# Altium PCB Linux_board.va_2.PcbDoc (part 2 of 2)
Units mil, origin at the board's own origin, x right, y up, seen from the top; angles counter-clockwise.
Board outline 3960 x 3160 mil, 2 copper layers (Top Layer, Bottom Layer); 142 components, 153 nets, 700 pads, 148 vias.
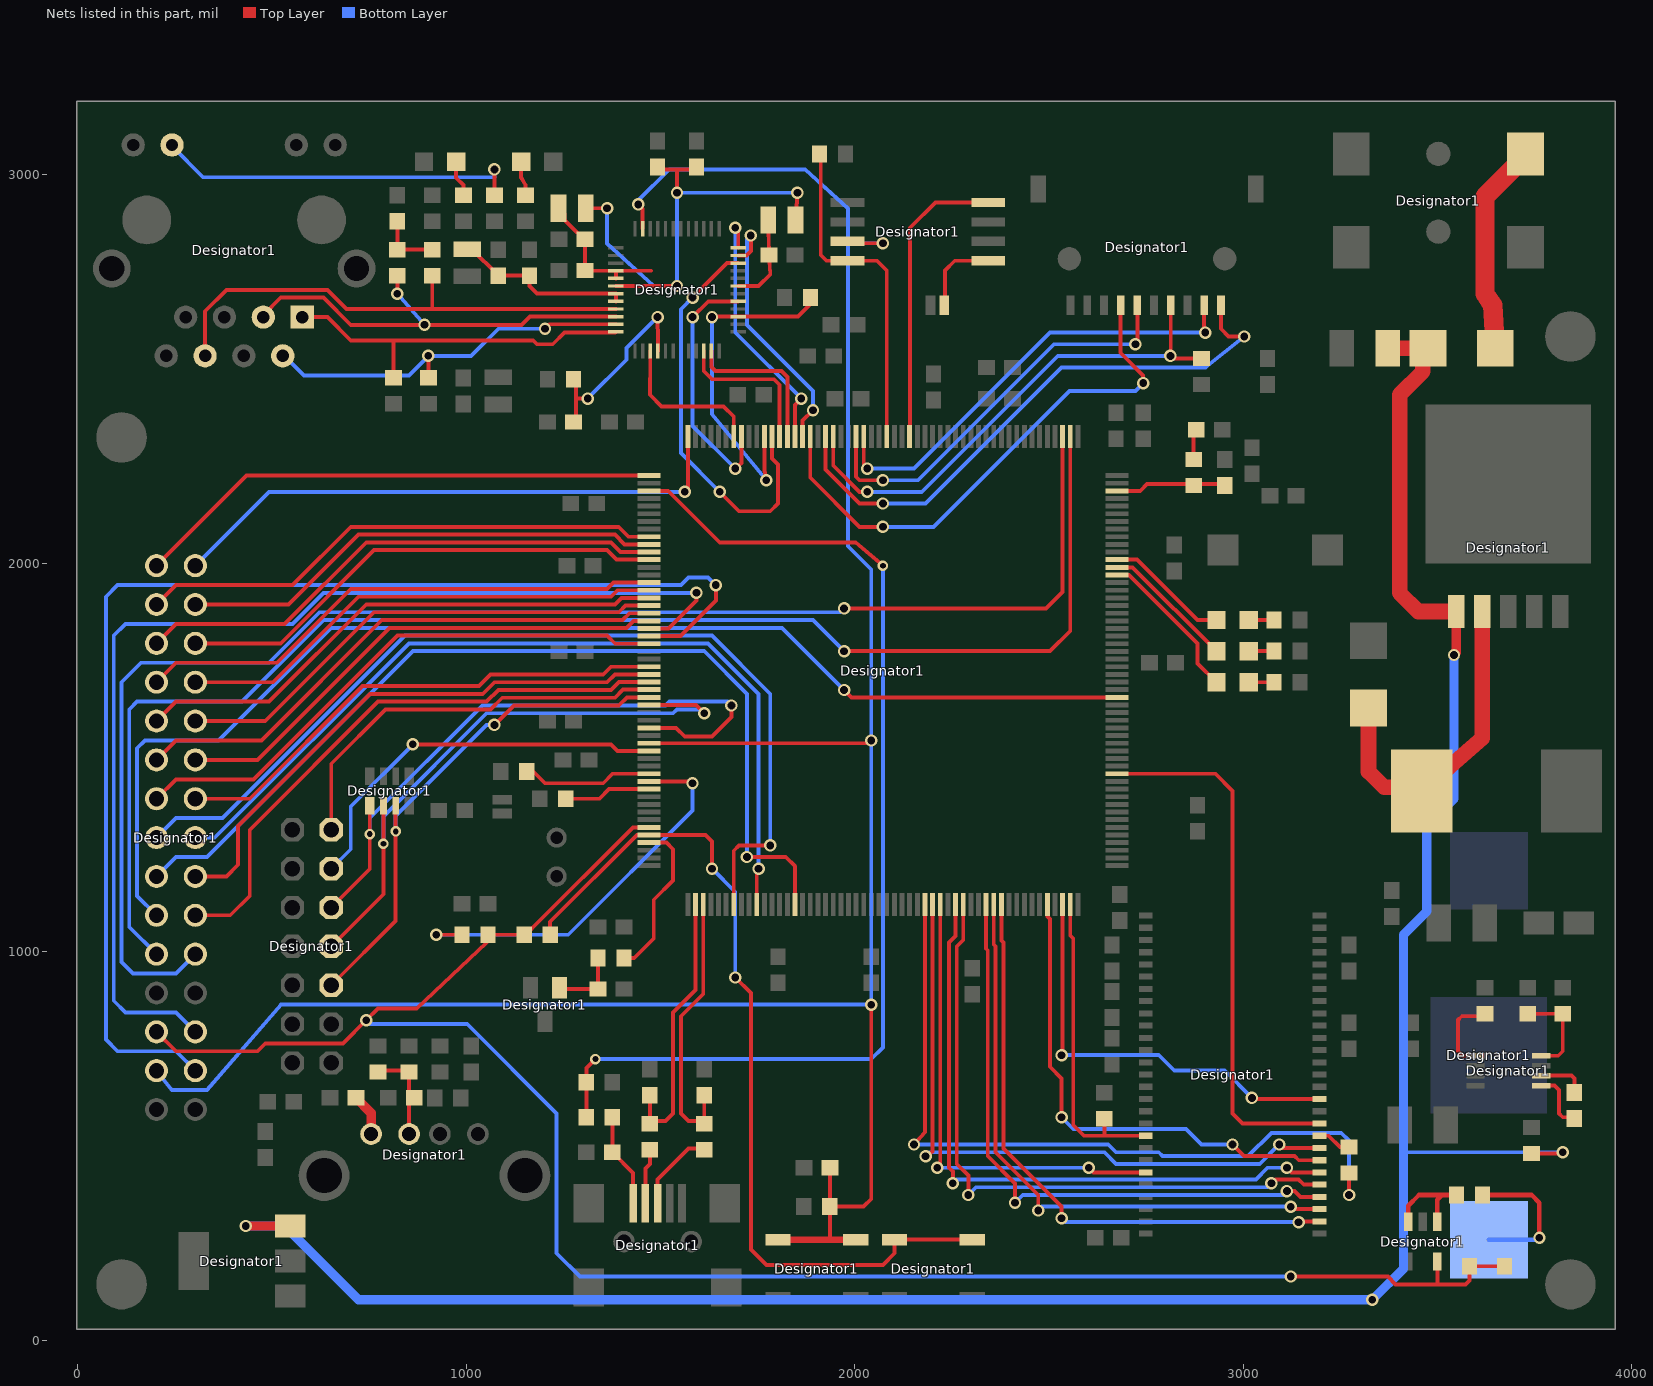
[diagram p2: the nets of this part, all layers, seen from the top]

## Via types
v1: diameter 32, hole 20, Top Layer to Bottom Layer, 84 vias
v2: diameter 31.68, hole 19.68, Top Layer to Bottom Layer, 53 vias
v3: diameter 27, hole 15, Top Layer to Bottom Layer, 7 vias
v4: diameter 35.62, hole 23.62, Top Layer to Bottom Layer, 4 vias

## Nets (pads, with @x,y where several pads share a name; then routed paths per layer and width w, separated by ;. In a path a pad name is that pad's centre, name@x,y a point inside that pad or via, vN(x,y) a via of type N, cw(c..) or ccw(c..) an arc to the next point about the centre after c; other vN are vias at no path point) (continued)
N$42: Designator1.1@1276.49,2474.27 Designator1.2@1276.49,2364.27 Designator1.P$16 | length 522.5
  Top Layer w10: Designator1.2@1276.49,2364.27 1283.02,2364.27 1283.02,2424.27 ; Designator1.1@1276.49,2474.27 1283.02,2470.8 1283.02,2424.27 ; v1(1313.02,2424.27) 1283.02,2424.27 ; v1(1493.02,2634.27) 1493.81,2573.48 Designator1.P$16@1493.81,2546.79
  Bottom Layer w10: v1(1313.02,2424.27) 1413.02,2524.27 1413.02,2554.27 v1(1493.02,2634.27)
N$43: Designator1.18@203.02,1394.27 Designator1.23@1470.66,1793.17 | length 1450.3
  Top Layer w10: Designator1.18@203.02,1394.27 253.02,1444.27 453.02,1444.27 823.02,1814.27 1363.02,1814.27 1384.13,1793.17 Designator1.23@1470.66,1793.17
N$44: Designator1.17@303.02,1394.27 Designator1.26@1470.66,1734.11 | length 1308.4
  Top Layer w10: Designator1.17@303.02,1394.27 443.02,1394.27 733.02,1684.27 1033.02,1684.27 1063.02,1714.27 1353.02,1714.27 1372.87,1734.11 Designator1.26@1470.66,1734.11
N$45: Designator1.8@2344.13,2929.27 Designator1.179 | length 766.1
  Top Layer w10: Designator1.179@2141.92,2326.63 2143.02,2327.73 2143.02,2864.27 2208.02,2929.27 Designator1.8@2344.13,2929.27
N$46: Designator1.9@1470.66,2068.76 Designator1.28@203.02,1894.27 | length 1361
  Top Layer w10: Designator1.28@203.02,1894.27 253.02,1944.27 553.02,1944.27 703.02,2094.27 1393.02,2094.27 1418.54,2068.76 Designator1.9@1470.66,2068.76
N$47: Designator1.11@653.02,1214.27 Designator1.37@1470.66,1517.57 | length 1021.5
  Top Layer w10: v2(863.02,1534.27) 1373.02,1534.27 1389.72,1517.57 Designator1.37@1470.66,1517.57
  Bottom Layer w10: Designator1.11@653.02,1214.27 703.02,1264.27 703.02,1374.27 v2(863.02,1534.27)
N$48: Designator1.3@818.77,1375.88 Designator1.5@653.02,914.27 Designator1.30@1470.66,1655.37 | length 1348.6
  Top Layer w10: Designator1.5@653.02,914.27 818.77,1080.02 v3(818.77,1310.02) Designator1.3@818.77,1375.88 ; v1(1073.02,1584.27) 1123.02,1634.27 1393.02,1634.27 1414.13,1655.37 Designator1.30@1470.66,1655.37
  Bottom Layer w10: v3(818.77,1310.02) 818.77,1350.02 1053.02,1584.27 v1(1073.02,1584.27)
N$49: Designator1.2@787.28,1375.88 Designator1.7@653.02,1014.27 Designator1.31@1470.66,1635.69 | length 1582.6
  Top Layer w10: Designator1.7@653.02,1014.27 787.28,1148.52 v3(787.28,1278.52) Designator1.2@787.28,1375.88 ; Designator1.31@1470.66,1635.69 1591.61,1635.69 v1(1613.02,1614.27)
  Bottom Layer w10: v3(787.28,1278.52) 787.28,1348.52 1053.02,1614.27 1533.02,1614.27 1543.02,1624.27 1603.02,1624.27 v1(1613.02,1614.27)
N$50: Designator1.1@752.04,1375.88 Designator1.9@653.02,1114.27 Designator1.34@1470.66,1576.63 | length 1675.3
  Top Layer w10: Designator1.9@653.02,1114.27 752.04,1213.28 v3(752.04,1303.28) Designator1.1@752.04,1375.88 ; Designator1.34@1470.66,1576.63 1540.66,1576.63 1563.02,1554.27 1633.02,1554.27 1683.02,1604.27 v1(1683.02,1634.27)
  Bottom Layer w10: v3(752.04,1303.28) 752.04,1344.27 1042.04,1634.27 1513.02,1634.27 1523.02,1644.27 1673.02,1644.27 v1(1683.02,1634.27)
N$52: Designator1.13@303.02,1194.27 Designator1.27@1470.66,1714.43 | length 1441.7
  Top Layer w10: Designator1.13@303.02,1194.27 383.02,1194.27 413.02,1224.27 413.02,1324.27 753.02,1664.27 1043.02,1664.27 1073.02,1694.27 1363.02,1694.27 1383.18,1714.43 Designator1.27@1470.66,1714.43
N$53: Designator1.29@3196.65,306.31 Designator1.94 | length 1540.4
  Top Layer w10: Designator1.94@2378.14,1121.91 2378.14,1029.15 2383.02,1024.27 2383.02,494.27 2533.02,344.27 v1(2533.02,314.27) ; v1(3143.02,304.27) 3145.07,306.31 Designator1.29@3196.65,306.31
  Bottom Layer w10: v1(2533.02,314.27) 2543.02,304.27 v1(3143.02,304.27)
N$54: Designator1.30@3196.65,337.81 Designator1.93 | length 1565.5
  Top Layer w10: Designator1.93@2358.46,1121.91 2358.46,1018.83 2363.02,1014.27 2363.02,484.27 2473.02,374.27 v1(2473.02,334.27) ; v1(3123.02,344.27) 3129.48,337.81 Designator1.30@3196.65,337.81
  Bottom Layer w10: v1(2473.02,334.27) 2483.02,344.27 v1(3123.02,344.27)
N$55: Designator1.31@3196.65,369.31 Designator1.92 | length 1600.7
  Top Layer w10: Designator1.92@2338.77,1121.91 2338.77,1008.52 2343.02,1004.27 2343.02,474.27 2413.02,404.27 v1(2413.02,354.27) ; v1(3113.02,384.27) 3133.02,384.27 3147.98,369.31 Designator1.31@3196.65,369.31
  Bottom Layer w10: v1(2413.02,354.27) 2433.02,374.27 3103.02,374.27 v1(3113.02,384.27)
N$56: Designator1.32@3196.65,400.8 Designator1.89 | length 1692.8
  Top Layer w10: Designator1.89@2279.72,1121.91 2279.72,1030.96 2263.02,1014.27 2263.02,454.27 2293.02,424.27 v1(2293.02,374.27) ; v1(3073.02,404.27) 3083.02,414.27 3143.02,414.27 3156.49,400.8 Designator1.32@3196.65,400.8
  Bottom Layer w10: v1(2293.02,374.27) 2313.02,394.27 3063.02,394.27 v1(3073.02,404.27)
N$57: Designator1.33@3196.65,432.3 Designator1.88 | length 1694
  Top Layer w10: v1(2253.02,404.27) 2253.02,434.27 2243.02,444.27 2243.02,1024.27 2260.03,1041.28 Designator1.88@2260.03,1121.91 ; v1(3113.02,444.27) 3124.99,432.3 Designator1.33@3196.65,432.3
  Bottom Layer w10: v1(2253.02,404.27) 2263.02,414.27 3033.02,414.27 3063.02,444.27 v1(3113.02,444.27)
N$58: Designator1.34@3196.65,463.8 Designator1.100 | length 1272.3
  Top Layer w10: Designator1.100@2496.25,1121.91 2496.25,1091.04 2503.02,1084.27 2503.02,704.27 2533.02,674.27 v1(2533.02,574.27) ; v1(2973.02,504.27) 3003.02,474.27 3133.02,474.27 3143.5,463.8 Designator1.34@3196.65,463.8
  Bottom Layer w10: v1(2533.02,574.27) 2563.02,544.27 2853.02,544.27 2893.02,504.27 v1(2973.02,504.27)
N$59: Designator1.22@2749.4,432.3 Designator1.86 | length 1222.1
  Top Layer w10: v1(2213.02,444.27) 2220.66,451.91 Designator1.86@2220.66,1121.91 ; v1(2603.02,444.27) 2614.99,432.3 Designator1.22@2749.4,432.3
  Bottom Layer w10: v1(2213.02,444.27) v1(2603.02,444.27)
N$60: Designator1.35@3196.65,495.29 Designator1.85 | length 1711.8
  Top Layer w10: v1(2183.02,474.27) 2200.98,486.31 Designator1.85@2200.98,1121.91 ; v1(3093.02,504.27) 3102,495.29 Designator1.35@3196.65,495.29
  Bottom Layer w10: v1(2183.02,474.27) 2193.02,484.27 2643.02,484.27 2673.02,454.27 3043.02,454.27 v1(3093.02,504.27)
N$61: Designator1.2@3273.02,430.8 Designator1.84 | length 1990.5
  Top Layer w10: v1(2153.02,504.27) 2181.29,536 Designator1.84@2181.29,1121.91 ; v1(3273.02,374.27) Designator1.2@3273.02,430.8
  Bottom Layer w10: v1(2153.02,504.27) 2653.02,504.27 2673.02,484.27 2783.02,484.27 2793.02,474.27 3013.02,474.27 3073.02,534.27 3253.02,534.27 3273.02,514.27 v1(3273.02,374.27)
N$62: Designator1.1@3273.02,497.73 Designator1.36@3196.65,526.79 | length 88.4
  Top Layer w10: Designator1.36@3196.65,526.79 3220.5,526.79 3249.56,497.73 Designator1.1@3273.02,497.73
N$63: Designator1.1@989.56,1044.27 Designator1.41@1470.66,1438.83 | length 1043.3
  Top Layer w10: v2(923.02,1044.27) Designator1.1@989.56,1044.27 ; Designator1.41@1470.66,1438.83 1578.46,1438.83 v2(1583.02,1434.27)
  Bottom Layer w10: v2(923.02,1044.27) 1263.02,1044.27 1583.02,1364.27 v2(1583.02,1434.27)
N$64: Designator1.1@1909.56,3054.27 Designator1.4@1981.92,2779.27 Designator1.182 | length 875.6
  Top Layer w10: Designator1.1@1909.56,3054.27 1913.02,3050.8 1913.02,2794.27 1928.02,2779.27 Designator1.4@1981.92,2779.27 2058.02,2779.27 2082.87,2754.43 Designator1.182@2082.87,2326.63
N$65: Designator1.11@303.02,1094.27 Designator1.28@1470.66,1694.74 | length 1515.9
  Top Layer w10: Designator1.11@303.02,1094.27 393.02,1094.27 443.02,1144.27 443.02,1314.27 773.02,1644.27 1053.02,1644.27 1083.02,1674.27 1373.02,1674.27 1393.5,1694.74 Designator1.28@1470.66,1694.74
N$66: Designator1.1@823.02,2880.8 Designator1.2@823.02,2807.73 Designator1.2@913.02,2807.73 | length 163.1
  Top Layer w10: Designator1.1@823.02,2880.8 Designator1.2@823.02,2807.73 Designator1.2@913.02,2807.73
N$67: Designator1.2@1003.02,2809.31 Designator1.2@1083.02,2740.8 Designator1.2@1163.02,2740.8 Designator1.P$7 Designator1.P$8 | length 466.1
  Top Layer w10: Designator1.2@1003.02,2809.31 1013.02,2810.8 Designator1.2@1083.02,2740.8 Designator1.2@1163.02,2740.8 1163.02,2714.27 1182.87,2694.43 Designator1.P$7@1385.54,2694.43 Designator1.P$8@1385.54,2674.74
N$68: Designator1.1@1240.43,907.58 Designator1.2@1339.56,904.27 Designator1.2@1339.56,984.27 | length 180.5
  Top Layer w10: Designator1.1@1240.43,907.58 1243.73,904.27 Designator1.2@1339.56,904.27 Designator1.2@1339.56,984.27
N$69: Designator1.202 Designator1.P$15 | length 403.4
  Top Layer w10: Designator1.P$15@1474.13,2546.79 1474.13,2523.17 1473.02,2434.27 1503.02,2404.27 1663.02,2404.27 1689.17,2378.13 Designator1.202@1689.17,2326.63
N$70: Designator1.2@1886.49,2684.27 Designator1.198 Designator1.P$27 | length 865.8
  Top Layer w10: v1(1633.02,2634.27) 1634.13,2635.37 Designator1.P$27@1700.5,2635.37 1854.13,2635.37 1883.02,2664.27 Designator1.2@1886.49,2684.27 ; Designator1.198@1767.91,2326.63 1767.91,2239.39 v1(1773.02,2214.27)
  Bottom Layer w10: v1(1633.02,2634.27) 1633.02,2384.27 v1(1773.02,2214.27)
N$71: Designator1.39@3196.65,621.28 Designator1.102 | length 1099.2
  Top Layer w10: v1(2533.02,734.27) 2535.62,736.87 Designator1.102@2535.62,1121.91 ; v1(3023.02,624.27) 3026.02,621.28 Designator1.39@3196.65,621.28
  Bottom Layer w10: v1(2533.02,734.27) 2783.02,734.27 2823.02,694.27 2953.02,694.27 v1(3023.02,624.27)
N$72: Designator1.195 Designator1.P$23 | length 400.7
  Top Layer w10: Designator1.P$23@1631.61,2546.79 1631.61,2505.69 1641.61,2495.69 1811.61,2495.69 1826.96,2480.33 Designator1.195@1826.96,2326.63
N$73: Designator1.196 Designator1.P$22 | length 394.8
  Top Layer w10: Designator1.P$22@1611.92,2546.79 1611.92,2495.37 1633.02,2474.27 1793.02,2474.27 1807.28,2460.02 Designator1.196@1807.28,2326.63
N$74: Designator1.201 Designator1.P$29 | length 659.2
  Top Layer w10: v1(1583.02,2634.27) 1623.5,2674.74 Designator1.P$29@1700.5,2674.74 ; v1(1693.02,2244.27) 1708.85,2258.44 Designator1.201@1708.85,2326.63
  Bottom Layer w10: v1(1583.02,2634.27) 1583.02,2354.27 v1(1693.02,2244.27)
N$75: Designator1.1@2230.74,2664.27 Designator1.5@2344.13,2779.27 | length 212.4
  Top Layer w10: Designator1.1@2230.74,2664.27 2233.02,2666.55 2233.02,2754.27 2258.02,2779.27 Designator1.5@2344.13,2779.27
N$76: Designator1.197 Designator1.P$34 | length 1065.9
  Top Layer w10: v1(1583.02,2684.27) 1671.92,2773.17 Designator1.P$34@1700.5,2773.17 ; v1(1653.02,2184.27) 1703.02,2134.27 1783.02,2134.27 1803.02,2154.27 1803.02,2254.27 1787.59,2269.7 Designator1.197@1787.59,2326.63
  Bottom Layer w10: v1(1583.02,2684.27) 1553.02,2654.27 1553.02,2284.27 v1(1653.02,2184.27)
N$77: Designator1.193 Designator1.P$35 | length 680.5
  Top Layer w10: Designator1.P$35@1700.5,2792.85 1721.61,2792.85 1733.02,2804.27 v1(1733.02,2844.27) ; Designator1.193@1866.33,2326.63 1866.33,2367.57 v1(1893.02,2394.27)
  Bottom Layer w10: v1(1733.02,2844.27) 1723.02,2834.27 1723.02,2614.27 1893.02,2444.27 v1(1893.02,2394.27)
N$78: Designator1.194 Designator1.P$36 | length 669.7
  Top Layer w10: v1(1693.02,2864.27) 1700.5,2856.79 Designator1.P$36@1700.5,2812.54 ; Designator1.194@1846.65,2326.63 1846.65,2407.89 v1(1863.02,2424.27)
  Bottom Layer w10: v1(1693.02,2864.27) 1693.02,2594.27 v1(1863.02,2424.27)
N$79: Designator1.2@1156.49,1464.27 Designator1.40@1470.66,1458.52 | length 336.6
  Top Layer w10: Designator1.2@1156.49,1464.27 1173.02,1464.27 1203.02,1434.27 1353.02,1434.27 1377.28,1458.52 Designator1.40@1470.66,1458.52
N$80: Designator1.143 Designator1.A@2931.69,1694.27 | length 400.7
  Top Layer w10: Designator1.143@2675.39,1970.33 2706.96,1970.33 2883.02,1794.27 2883.02,1742.93 Designator1.A@2931.69,1694.27
N$81: Designator1.2@993.02,2947.73 Designator1.C@974.36,3034.27 | length 94.3
  Top Layer w10: Designator1.C@974.36,3034.27 974.36,2992.93 993.02,2974.27 Designator1.2@993.02,2947.73
N$82: Designator1.10@1470.66,2049.07 Designator1.27@303.02,1894.27 | length 1252.6
  Top Layer w10: Designator1.27@303.02,1894.27 543.02,1894.27 723.02,2074.27 1383.02,2074.27 1408.22,2049.07 Designator1.10@1470.66,2049.07
N$83: Designator1.2@1256.49,1394.27 Designator1.42@1470.66,1419.15 | length 224.5
  Top Layer w10: Designator1.2@1256.49,1394.27 1343.02,1394.27 1367.91,1419.15 Designator1.42@1470.66,1419.15
N$84: Designator1.2@2643.02,570.8 Designator1.19@2749.4,526.79 Designator1.103 | length 812.6
  Top Layer w10: Designator1.103@2555.31,1121.91 2555.31,1041.98 2563.02,1034.27 2563.02,554.27 2590.5,526.79 2643.02,526.79 ; Designator1.2@2643.02,570.8 2643.02,526.79 ; Designator1.19@2749.4,526.79 2643.02,526.79
N$85: Designator1.37@3196.65,558.28 Designator1.117 | length 1380.4
  Top Layer w10: Designator1.117@2675.39,1458.52 2928.77,1458.52 2973.02,1414.27 2973.02,584.27 2999.01,558.28 Designator1.37@3196.65,558.28
N$86: Designator1.1@1237.98,2914.27 Designator1.1@1306.49,2754.27 Designator1.1@1306.49,2834.27 Designator1.P$4@1385.54,2753.48 Designator1.P$5@1385.54,2733.8 | length 470.1
  Top Layer w10: Designator1.1@1237.98,2914.27 1253.02,2899.23 1253.02,2884.27 1283.02,2854.27 Designator1.1@1306.49,2834.27 Designator1.1@1306.49,2754.27 1476.49,2753.48 Designator1.P$4@1385.54,2753.48 Designator1.P$5@1385.54,2733.8
N$87: Designator1.1@1777.98,2884.27 Designator1.2@1779.56,2794.27 Designator1.P$31 | length 235.1
  Top Layer w10: Designator1.P$31@1700.5,2714.11 1752.87,2714.11 1783.02,2744.27 Designator1.2@1779.56,2794.27 Designator1.1@1777.98,2884.27
N$88: Designator1.2@1153.02,2947.73 Designator1.C@1141.69,3034.27 | length 89.7
  Top Layer w10: Designator1.C@1141.69,3034.27 1141.69,2992.93 1153.02,2974.27 Designator1.2@1153.02,2947.73
N$89: Designator1.1@1493.02,3020.8 Designator1.1@1593.02,3020.8 Designator1.2@1308.06,2914.27 Designator1.2@1848.06,2884.27 Designator1.P$6@1385.54,2714.11 | length 1331.4
  Top Layer w10: Designator1.2@1308.06,2914.27 v1(1363.02,2914.27) ; Designator1.P$6@1385.54,2714.11 1523.02,2714.11 v1(1543.02,2714.27) ; Designator1.1@1493.02,3014.27 Designator1.1@1493.02,3020.8 1499.56,3014.27 1543.02,3014.27 ; v1(1543.02,2954.27) 1543.02,3014.27 ; Designator1.1@1593.02,3020.8 1593.02,3014.27 1543.02,3014.27 ; Designator1.2@1848.06,2884.27 1848.06,2879.23 v1(1853.02,2954.27)
  Bottom Layer w10: v1(1363.02,2914.27) 1363.02,2824.11 1483.02,2714.11 1492.87,2714.11 v1(1543.02,2714.27) v1(1543.02,2954.27) v1(1853.02,2954.27)
N$90: Designator1.144 Designator1.A@2931.69,1774.27 | length 345.7
  Top Layer w10: Designator1.144@2675.39,1990.02 2715.94,1990.02 Designator1.A@2931.69,1774.27
N$91: Designator1.1@3500.43,305.45 Designator1.2@3549.56,374.27 Designator1.3@3425.62,305.45 | length 250.7
  Top Layer w12: Designator1.3@3425.62,305.45 3425.62,346.87 3453.02,374.27 3513.02,374.27 ; Designator1.1@3500.43,305.45 3500.43,361.67 3513.02,374.27 ; Designator1.2@3549.56,374.27 3513.02,374.27
N$92: Designator1.2@1073.02,2947.73 Designator1.11@243.02,3077.27 | length 952.7
  Top Layer w10: Designator1.2@1073.02,2947.73 v1(1073.02,3014.27)
  Bottom Layer w10: Designator1.11@243.02,3077.27 243.02,3074.27 323.02,2994.27 1073.02,2994.27 v1(1073.02,3014.27)
N$94: Designator1.145 Designator1.A@2931.69,1854.27 | length 320.7
  Top Layer w10: Designator1.145@2675.39,2009.7 2727.59,2009.7 2883.02,1854.27 Designator1.A@2931.69,1854.27
N$95: Designator1.1@3079.56,1854.27 Designator1.C@3014.36,1854.27 | length 65.2
  Top Layer w10: Designator1.C@3014.36,1854.27 Designator1.1@3079.56,1854.27
N$96: Designator1.2@1473.02,557.73 Designator1.2@1473.02,630.8 Designator1.54@1590.74,1121.91 | length 705.6
  Top Layer w10: Designator1.2@1473.02,630.8 Designator1.2@1473.02,557.73 1479.56,564.27 1513.02,564.27 1533.02,584.27 1533.02,844.27 1590.74,901.98 Designator1.54@1590.74,1121.91
N$97: Designator1.2@1613.02,557.73 Designator1.2@1613.02,630.8 Designator1.55 | length 713.3
  Top Layer w10: Designator1.55@1610.43,1121.91 1610.43,891.67 1553.02,834.27 1553.02,584.27 1573.02,564.27 1609.56,564.27 Designator1.2@1613.02,557.73 ; Designator1.2@1613.02,630.8 Designator1.2@1613.02,557.73 ; Designator1.2@1619.56,557.73 Designator1.2@1613.02,557.73
N$98: Designator1.1@3079.56,1774.27 Designator1.C@3014.36,1774.27 | length 65.2
  Top Layer w10: Designator1.C@3014.36,1774.27 Designator1.1@3079.56,1774.27
N$99: Designator1.1@1473.02,490.8 Designator1.D-@1461.53,352.69 | length 142.9
  Top Layer w10: Designator1.D-@1461.53,352.69 1461.53,442.77 1473.02,454.27 Designator1.1@1473.02,490.8
N$100: Designator1.1@1613.02,490.8 Designator1.D+@1493.02,352.69 | length 216.1
  Top Layer w10: Designator1.D+@1493.02,352.69 1493.02,414.27 1573.02,494.27 1609.56,494.27 Designator1.1@1613.02,490.8
N$101: Designator1.1@3079.56,1694.27 Designator1.C@3014.36,1694.27 | length 65.2
  Top Layer w10: Designator1.C@3014.36,1694.27 Designator1.1@3079.56,1694.27
N$102: Designator1.1@1376.49,574.27 Designator1.2@1376.49,484.27 Designator1.VBUS@1430.03,352.69 | length 243.8
  Top Layer w10: Designator1.1@1376.49,574.27 Designator1.2@1376.49,484.27 1430.03,430.72 Designator1.VBUS@1430.03,352.69
N$103: Designator1.11@1470.66,2029.39 Designator1.26@203.02,1794.27 | length 1385.6
  Top Layer w10: Designator1.26@203.02,1794.27 253.02,1844.27 533.02,1844.27 743.02,2054.27 1373.02,2054.27 1397.91,2029.39 Designator1.11@1470.66,2029.39
N$104: Designator1.12@1470.66,2009.7 Designator1.25@303.02,1794.27 | length 1277.2
  Top Layer w10: Designator1.25@303.02,1794.27 523.02,1794.27 763.02,2034.27 1363.02,2034.27 1387.59,2009.7 Designator1.12@1470.66,2009.7
N$106: Designator1.1@3616.49,374.27 Designator1.V2 | length 376
  Top Layer w12: Designator1.1@3616.49,374.27 3743.02,374.27 3763.02,354.27 v2(3763.02,264.27)
  Bottom Layer w12: Designator1.V2@3633.02,259.27 3753.02,259.27 v2(3763.02,264.27)
N$107: Designator1.8@2943.02,2664.27 Designator1.190 | length 1500
  Top Layer w10: Designator1.190@1925.39,2326.63 1925.39,2241.91 2013.02,2154.27 v1(2073.02,2154.27) ; Designator1.8@2943.02,2664.27 2943.02,2604.27 2963.02,2584.27 v1(3003.02,2584.27)
  Bottom Layer w10: v1(2073.02,2154.27) 2183.02,2154.27 2533.02,2504.27 2903.02,2504.27 v1(3003.02,2584.27)
N$108: Designator1.15@1470.66,1950.65 Designator1.24@203.02,1694.27 | length 1373.8
  Top Layer w10: Designator1.24@203.02,1694.27 253.02,1744.27 513.02,1744.27 703.02,1934.27 1363.02,1934.27 1379.4,1950.65 Designator1.15@1470.66,1950.65
N$109: Designator1.16@1470.66,1930.96 Designator1.23@303.02,1694.27 | length 1265.7
  Top Layer w10: Designator1.23@303.02,1694.27 503.02,1694.27 723.02,1914.27 1373.02,1914.27 1389.72,1930.96 Designator1.16@1470.66,1930.96
N$110: Designator1.17@1470.66,1911.28 Designator1.22@203.02,1594.27 | length 1398.9
  Top Layer w10: Designator1.22@203.02,1594.27 253.02,1644.27 493.02,1644.27 743.02,1894.27 1383.02,1894.27 1400.03,1911.28 Designator1.17@1470.66,1911.28
N$111: Designator1.18@1470.66,1891.59 Designator1.21@303.02,1594.27 | length 1290.8
  Top Layer w10: Designator1.21@303.02,1594.27 483.02,1594.27 763.02,1874.27 1393.02,1874.27 1410.35,1891.59 Designator1.18@1470.66,1891.59
N$112: Designator1.19@1470.66,1871.91 Designator1.20@203.02,1494.27 | length 1424.1
  Top Layer w10: Designator1.20@203.02,1494.27 253.02,1544.27 473.02,1544.27 783.02,1854.27 1403.02,1854.27 1420.66,1871.91 Designator1.19@1470.66,1871.91
N$113: Designator1.19@303.02,1494.27 Designator1.20@1470.66,1852.22 | length 1315.9
  Top Layer w10: Designator1.19@303.02,1494.27 463.02,1494.27 803.02,1834.27 1413.02,1834.27 1430.98,1852.22 Designator1.20@1470.66,1852.22
N$114: Designator1.10@203.02,994.27 Designator1.158 | length 3731.4
  Top Layer w10: v1(1973.02,1774.27) 2503.02,1774.27 2555.31,1826.55 Designator1.158@2555.31,2326.63
  Bottom Layer w10: Designator1.10@203.02,994.27 133.02,1064.27 133.02,1624.27 153.02,1644.27 423.02,1644.27 633.02,1854.27 1893.02,1854.27 v1(1973.02,1774.27)
N$115: Designator1.9@303.02,994.27 Designator1.159 | length 3861.8
  Top Layer w10: v1(1973.02,1884.27) 2493.02,1884.27 2535.62,1926.87 Designator1.159@2535.62,2326.63
  Bottom Layer w10: Designator1.9@303.02,994.27 253.02,944.27 143.02,944.27 113.02,974.27 113.02,1694.27 163.02,1744.27 493.02,1744.27 623.02,1874.27 1583.02,1874.27 1963.02,1874.27 v1(1973.02,1884.27)
N$116: Designator1.5@303.02,794.27 Designator1.21@1470.66,1832.54 | length 2900.8
  Top Layer w10: Designator1.21@1470.66,1832.54 1521.29,1832.54 1593.02,1904.27 v1(1593.02,1924.27)
  Bottom Layer w10: Designator1.5@303.02,794.27 253.02,844.27 123.02,844.27 93.02,874.27 93.02,1814.27 123.02,1844.27 553.02,1844.27 633.02,1924.27 v1(1593.02,1924.27)
N$117: Designator1.3@303.02,694.27 Designator1.22@1470.66,1812.85 | length 3252.4
  Top Layer w10: Designator1.22@1470.66,1812.85 1551.61,1812.85 1643.02,1904.27 v1(1643.02,1944.27)
  Bottom Layer w10: Designator1.3@303.02,694.27 253.02,744.27 103.02,744.27 73.02,774.27 73.02,1914.27 103.02,1944.27 1553.02,1944.27 1573.02,1964.27 1623.02,1964.27 v1(1643.02,1944.27)
N$118: Designator1.15@303.02,1294.27 Designator1.62 | length 2255.2
  Top Layer w10: Designator1.62@1748.22,1121.91 1748.22,1209.07 v1(1753.02,1214.27)
  Bottom Layer w10: Designator1.15@303.02,1294.27 353.02,1294.27 853.02,1794.27 1623.02,1794.27 1753.02,1664.27 v1(1753.02,1214.27)
N$119: Designator1.2@2873.02,2267.73 Designator1.2@2879.56,2344.27 | length 79.2
  Top Layer w10: Designator1.2@2873.02,2267.73 2873.02,2337.73 Designator1.2@2879.56,2344.27
N$120: Designator1.1@2873.02,2200.8 Designator1.2@2953.02,2200.8 Designator1.154 | length 294.6
  Top Layer w10: Designator1.154@2675.39,2186.87 2735.62,2186.87 2753.02,2204.27 Designator1.1@2873.02,2204.27 ; Designator1.1@2869.56,2204.27 Designator1.1@2873.02,2200.8 Designator1.1@2873.02,2204.27 ; Designator1.2@2953.02,2200.8 2949.56,2204.27 Designator1.1@2873.02,2204.27
N$121: Designator1.1@716.49,624.27 Designator1.VBUS@755.52,531.27 | length 109.2
  Top Layer w24: Designator1.1@716.49,624.27 755.52,585.23 Designator1.VBUS@755.52,531.27
N$122: Designator1.14@203.02,1194.27 Designator1.67 | length 2458
  Top Layer w10: v1(1723.02,1244.27) 1823.02,1244.27 1846.65,1220.65 Designator1.67@1846.65,1121.91
  Bottom Layer w10: Designator1.14@203.02,1194.27 253.02,1244.27 333.02,1244.27 863.02,1774.27 1613.02,1774.27 1723.02,1664.27 v1(1723.02,1244.27)
N$123: Designator1.16@203.02,1294.27 Designator1.59 | length 2485.6
  Top Layer w10: Designator1.59@1689.17,1121.91 1689.17,1260.41 1703.02,1274.27 v1(1783.02,1274.27)
  Bottom Layer w10: Designator1.16@203.02,1294.27 253.02,1344.27 373.02,1344.27 843.02,1814.27 1633.02,1814.27 1783.02,1664.27 v1(1783.02,1274.27)
N$124: Designator1.12@203.02,1094.27 Designator1.127 | length 3175.6
  Top Layer w10: v1(1973.02,1674.27) 1991.92,1655.37 Designator1.127@2675.39,1655.37
  Bottom Layer w10: Designator1.12@203.02,1094.27 153.02,1144.27 153.02,1524.27 173.02,1544.27 363.02,1544.27 653.02,1834.27 1813.02,1834.27 v1(1973.02,1674.27)
N$125: Designator1.13@653.02,1314.27 Designator1.29@1470.66,1675.06 | length 1066.7
  Top Layer w10: Designator1.13@653.02,1314.27 653.02,1484.27 793.02,1624.27 1063.02,1624.27 1093.02,1654.27 1383.02,1654.27 1403.81,1675.06 Designator1.29@1470.66,1675.06
N$126: Designator1.A@3649.64,2554.27 Designator1.VIN0 | length 549.5
  Top Layer w50: Designator1.A@3649.64,2554.27 3643.02,2664.27 3623.02,2694.27 3623.02,2944.27 3727.43,3048.68 Designator1.VIN0@3727.43,3054.27
N$127: Designator1.1@3460.11,1414.27 Designator1.2@3616.02,1876.27 Designator1.C@3323.02,1627.65 | length 874.1
  Top Layer w40: Designator1.C@3323.02,1627.65 3323.02,1464.27 3363.02,1424.27 3470.11,1424.27 Designator1.1@3460.11,1414.27 3616.02,1550.18 Designator1.2@3616.02,1876.27
N$130: Designator1.2@3853.02,637.73 Designator1.6@3767.47,681.47 | length 125.1
  Top Layer w10: Designator1.6@3767.47,681.47 3845.82,681.47 3853.02,674.27 Designator1.2@3853.02,637.73
N$131: Designator1.1@3853.02,570.8 Designator1.5@3767.47,655.88 | length 155.9
  Top Layer w10: Designator1.5@3767.47,655.88 3801.41,655.88 3813.02,644.27 3813.02,584.27 3823.02,574.27 3849.56,574.27 Designator1.1@3853.02,570.8
N$132: Designator1.2@3733.02,840.8 Designator1.2@3823.02,840.8 Designator1.8@3767.47,732.65 | length 246.9
  Top Layer w10: Designator1.2@3733.02,840.8 Designator1.2@3823.02,840.8 3823.02,744.27 3811.41,732.65 Designator1.8@3767.47,732.65
N$134: Designator1.1@3598.57,732.65 Designator1.1@3623.02,840.8 | length 207.2
  Top Layer w10: Designator1.1@3598.57,732.65 3564.64,732.65 3553.02,744.27 3553.02,824.27 3563.02,834.27 3616.49,834.27 Designator1.1@3623.02,840.8
N$164: Designator1.1@1216.49,1044.27 Designator1.3@2303.02,259.27 Designator1.4@2103.02,259.27 Designator1.48@1470.66,1301.04 | length 2274.9
  Top Layer w10: Designator1.1@1216.49,1044.27 1216.49,1077.73 1439.8,1301.04 Designator1.48@1470.66,1301.04 1616.25,1301.04 1633.02,1284.27 v2(1633.02,1214.27) ; v2(1693.02,934.27) 1733.02,894.27 1733.02,234.27 1773.02,194.27 2073.02,194.27 2103.02,224.27 Designator1.4@2103.02,259.27 Designator1.3@2303.02,259.27
  Bottom Layer w10: v2(1633.02,1214.27) 1693.02,1154.27 v2(1693.02,934.27)
NRST: Designator1.1@1803.02,259.27 Designator1.1@1936.49,444.27 Designator1.2@1936.49,344.27 Designator1.2@2003.02,259.27 Designator1.3@1981.92,2829.27 Designator1.4@203.02,694.27 Designator1.36@1470.66,1537.26 Designator1.P$47 | length 6485.6
  Top Layer w10: v1(1443.02,2924.27) 1454.44,2912.85 Designator1.P$47@1454.44,2861.75 ; Designator1.36@1470.66,1537.26 2036.02,1537.26 v1(2043.02,1544.27) ; 1936.49,259.27 Designator1.2@1936.49,344.27 ; Designator1.1@1936.49,444.27 Designator1.2@1936.49,344.27 ; Designator1.3@1981.92,2829.27 1996.92,2824.27 v1(2073.02,2824.27) ; v1(2043.02,864.27) 2043.02,364.27 2023.02,344.27 Designator1.2@1936.49,344.27
  Top Layer w16: Designator1.1@1803.02,259.27 1936.49,259.27 Designator1.2@2003.02,259.27
  Bottom Layer w10: Designator1.4@203.02,694.27 243.02,644.27 333.02,644.27 523.02,864.27 v1(2043.02,864.27) v1(2043.02,1544.27) 2043.02,1984.27 1983.02,2044.27 1983.02,2824.27 ; v1(1443.02,2924.27) 1443.02,2934.27 1523.02,3014.27 1873.02,3014.27 1983.02,2914.27 1983.02,2824.27 ; v1(2073.02,2824.27) 1983.02,2824.27
RD+: Designator1.1@823.02,2740.8 Designator1.3@478.02,2634.27 Designator1.P$10 | length 1121.7
  Top Layer w10: Designator1.3@478.02,2634.27 478.02,2639.27 523.02,2684.27 633.02,2684.27 703.02,2614.27 v1(893.02,2614.27) 1143.02,2614.27 1164.13,2635.37 Designator1.P$10@1385.54,2635.37 ; v1(823.02,2694.27) Designator1.1@823.02,2740.8
  Bottom Layer w10: v1(823.02,2694.27) v1(893.02,2614.27)
RD-: Designator1.1@913.02,2740.8 Designator1.6@328.02,2534.27 Designator1.P$9 | length 1301.4
  Top Layer w10: Designator1.6@328.02,2534.27 328.02,2649.27 383.02,2704.27 643.02,2704.27 692.24,2655.06 913.02,2655.06 ; Designator1.1@913.02,2740.8 913.02,2655.06 ; Designator1.P$9@1385.54,2655.06 913.02,2655.06
SDCLK: Designator1.1@2893.02,2527.73 Designator1.5@2814.02,2664.27 Designator1.189 | length 1328.2
  Top Layer w10: Designator1.189@1945.07,2326.63 1945.07,2252.22 2013.02,2184.27 v1(2033.02,2184.27) ; Designator1.5@2814.02,2664.27 2814.02,2565.27 v1(2813.02,2534.27) 2819.56,2527.73 Designator1.1@2893.02,2527.73
  Bottom Layer w10: v1(2033.02,2184.27) 2173.02,2184.27 2523.02,2534.27 v1(2813.02,2534.27)
SDCS: Designator1.2@2685.02,2664.27 Designator1.192 | length 1392.2
  Top Layer w10: Designator1.192@1886.02,2326.63 1886.02,2221.28 2013.02,2094.27 v1(2073.02,2094.27) ; Designator1.2@2685.02,2664.27 2685.02,2542.27 2743.02,2484.27 v1(2743.02,2464.27)
  Bottom Layer w10: v1(2073.02,2094.27) 2203.02,2094.27 2553.02,2444.27 2723.02,2444.27 v1(2743.02,2464.27)
SDMISO: Designator1.7@2900.02,2664.27 Designator1.185 | length 1172.4
  Top Layer w10: Designator1.185@2023.81,2326.63 2023.81,2253.48 v1(2033.02,2244.27) ; Designator1.7@2900.02,2664.27 2900.02,2597.27 v1(2903.02,2594.27)
  Bottom Layer w10: v1(2033.02,2244.27) 2153.02,2244.27 2503.02,2594.27 v1(2903.02,2594.27)
SDMOSI: Designator1.3@2728.02,2664.27 Designator1.186 | length 1073.1
  Top Layer w10: Designator1.186@2004.13,2326.63 2004.13,2223.17 2013.02,2214.27 v1(2073.02,2214.27) ; v1(2723.02,2564.27) 2728.02,2569.27 Designator1.3@2728.02,2664.27
  Bottom Layer w10: v1(2073.02,2214.27) 2163.02,2214.27 2513.02,2564.27 v1(2723.02,2564.27)
SHDN: Designator1.1@1406.49,984.27 Designator1.49@1470.66,1281.35 | length 417.4
  Top Layer w10: Designator1.1@1406.49,984.27 1433.02,984.27 1483.02,1034.27 1483.02,1134.27 1533.02,1184.27 1533.02,1264.27 1515.94,1281.35 Designator1.49@1470.66,1281.35
TD+: Designator1.1@578.02,2634.27 Designator1.1@813.02,2477.73 Designator1.P$12 | length 946.2
  Top Layer w10: Designator1.1@578.02,2634.27 643.02,2634.27 703.02,2574.27 813.02,2574.27 ; Designator1.1@813.02,2477.73 813.02,2574.27 ; Designator1.P$12@1385.54,2596 1383.81,2594.27 1253.02,2594.27 1223.02,2564.27 1183.02,2564.27 1173.02,2574.27 813.02,2574.27
TD-: Designator1.1@903.02,2477.73 Designator1.2@528.02,2534.27 Designator1.P$11 | length 989.2
  Top Layer w10: Designator1.1@903.02,2477.73 v2(903.02,2534.27) ; v2(1203.02,2604.27) 1214.44,2615.69 Designator1.P$11@1385.54,2615.69
  Bottom Layer w10: Designator1.2@528.02,2534.27 533.02,2534.27 583.02,2484.27 853.02,2484.27 v2(903.02,2534.27) 1013.02,2534.27 1083.02,2604.27 v2(1203.02,2604.27)
TWCK: Designator1.1@1470.66,2226.24 Designator1.30@203.02,1994.27 | length 1363.7
  Top Layer w10: Designator1.30@203.02,1994.27 434.99,2226.24 Designator1.1@1470.66,2226.24
TWD: Designator1.29@303.02,1994.27 Designator1.208 | length 1484.4
  Top Layer w10: v1(1563.02,2184.27) 1571.06,2192.3 Designator1.208@1571.06,2326.63
  Bottom Layer w10: Designator1.29@303.02,1994.27 493.02,2184.27 v1(1563.02,2184.27)
USB_D-: Designator1.1@853.02,690.8 Designator1.1@866.49,624.27 Designator1.2@773.02,690.8 Designator1.D-@853.52,531.27 | length 255.4
  Top Layer w10: Designator1.2@773.02,690.8 776.49,694.27 853.02,694.27 Designator1.1@853.02,690.8 853.02,637.73 Designator1.1@866.49,624.27 853.52,611.3 Designator1.D-@853.52,531.27
USBDETECT: Designator1.1@1309.56,664.27 Designator1.2@1309.56,574.27 Designator1.3@1470.66,2186.87 | length 2831.6
  Top Layer w10: Designator1.2@1309.56,574.27 Designator1.1@1309.56,664.27 1309.56,700.8 v3(1333.02,724.27) ; Designator1.3@1470.66,2186.87 1520.43,2186.87 1653.02,2054.27 2003.02,2054.27 v3(2073.02,1994.27)
  Bottom Layer w10: v3(1333.02,724.27) 2043.02,724.27 2073.02,754.27 v3(2073.02,1994.27)
VDDBU: Designator1.1@3673.02,190.8 Designator1.2@1056.49,1044.27 Designator1.2@1149.56,1044.27 Designator1.2@3583.02,190.8 Designator1.5@3500.43,203.09 Designator1.6@203.02,794.27 Designator1.47@1470.66,1320.72 | length 5095.2
  Top Layer w10: Designator1.6@203.02,794.27 253.02,744.27 463.02,744.27 483.02,764.27 683.02,764.27 v2(743.02,824.27) 773.02,854.27 873.02,854.27 1053.02,1024.27 1053.02,1044.27 Designator1.2@1056.49,1044.27 Designator1.2@1149.56,1044.27 ; Designator1.47@1470.66,1320.72 1429.48,1320.72 1169.56,1060.8 Designator1.2@1149.56,1044.27 ; v2(3123.02,164.27) 3373.02,164.27 3393.02,144.27 3500.43,144.27 ; 3500.43,176.87 Designator1.5@3500.43,203.09 3500.43,144.27 ; Designator1.1@3673.02,190.8 Designator1.2@3583.02,190.8 3583.02,154.27 3573.02,144.27 3500.43,144.27 ; Designator1.2@1149.56,1044.27 1153.02,1047.73 1153.02,1044.27 Designator1.2@1149.56,1044.27
  Bottom Layer w10: v2(743.02,824.27) 753.02,814.27 1003.02,814.27 1233.02,584.27 1233.02,224.27 1293.02,164.27 v2(3123.02,164.27)
VIN: Designator1.1@3549.02,1876.27 Designator1.2@3743.02,480.8 Designator1.3@547.04,294.82 Designator1.+@3372.08,2554.27 Designator1.C@3476.41,2554.27 | length 6456.8
  Top Layer w10: Designator1.2@3743.02,480.8 3819.56,480.8 v2(3823.02,484.27)
  Top Layer w16: v2(433.02,294.27) 433.02,294.82 Designator1.3@547.04,294.82
  Top Layer w24: v2(433.02,294.27) Designator1.3@513.02,294.27 ; v2(3543.02,1764.27) 3549.02,1770.27 Designator1.1@3549.02,1876.27
  Top Layer w40: Designator1.+@3372.08,2554.27 Designator1.C@3476.41,2554.27 3463.02,2540.88 3463.02,2494.27 3403.02,2434.27 3403.02,1924.27 3451.02,1876.27 Designator1.1@3549.02,1876.27
  Bottom Layer w10: 3413.02,484.27 v2(3823.02,484.27)
  Bottom Layer w24: v2(433.02,294.27) 533.02,294.27 723.02,104.27 v2(3333.02,104.27) 3413.02,184.27 3413.02,484.27 3413.02,1044.27 3473.02,1104.27 3473.02,1324.27 3543.02,1394.27 v2(3543.02,1764.27)
pads on no net: Designator1. Designator1.2@1470.66,2206.55 Designator1.4@299.01,204.27 Designator1.4@1470.66,2167.18 Designator1.4@3425.62,203.09 Designator1.7@278.02,2634.27 Designator1.7@1470.66,2108.13 Designator1.8@228.02,2534.27 Designator1.8@1470.66,2088.44 Designator1.9@2599.02,2664.27 Designator1.10@2556.02,2664.27 Designator1.40@3196.65,652.77 Designator1.56 Designator1.57 Designator1.58 Designator1.60 Designator1.61 Designator1.63 Designator1.64 Designator1.68 Designator1.69 Designator1.70 Designator1.71 Designator1.72 Designator1.73 Designator1.74 Designator1.75 Designator1.76 Designator1.79 Designator1.82 Designator1.83 Designator1.87 Designator1.101 Designator1.128 Designator1.129 Designator1.130 Designator1.131 Designator1.134 Designator1.135 Designator1.136 Designator1.137 Designator1.138 Designator1.139 Designator1.140 Designator1.141 Designator1.142 Designator1.152 Designator1.161 Designator1.162 Designator1.163 Designator1.164 Designator1.165 Designator1.166 Designator1.167 Designator1.168 Designator1.171 Designator1.172 Designator1.175 Designator1.176 Designator1.177 Designator1.178 Designator1.183 Designator1.184 Designator1.205 Designator1.206 Designator1.207 Designator1.GND@3278.61,3054.27 Designator1.ID Designator1.P$1@1670.19,136.16 Designator1.P$2@1315.86,136.16 Designator1.P$3@1666.25,352.69 Designator1.P$4@1315.86,352.69 Designator1.P$5@1151.52,424.27 Designator1.P$5@1406.41,254.27 Designator1.P$6@634.52,424.27 Designator1.P$6@1579.64,254.27 Designator1.P$14 Designator1.P$18 Designator1.P$19 Designator1.P$20 Designator1.P$21 Designator1.P$28 Designator1.P$32 Designator1.P$33 Designator1.P$38 Designator1.P$39 Designator1.P$44 Designator1.P$45 Designator1.P$46 Designator1.P$48 Designator1.RSV1 Designator1.RSV2 Designator1.V1 Designator1.VIN1
copper on no net: | length 10455.1
  Top Layer w7.52: 755.78,1303.28 ccw(c752.04,1303.28) 755.78,1303.28 ; 791.02,1278.52 ccw(c787.28,1278.52) 791.02,1278.52 ; 822.51,1310.02 ccw(c818.77,1310.02) 822.51,1310.02 ; 857.75,1284.27 ccw(c854.01,1284.27) 857.75,1284.27 ; 1336.76,724.27 ccw(c1333.02,724.27) 1336.76,724.27 ; 1416.76,1554.27 ccw(c1413.02,1554.27) 1416.76,1554.27 ; 2076.76,1994.27 ccw(c2073.02,1994.27) 2076.76,1994.27
  Top Layer w9.84: 437.95,294.27 ccw(c433.02,294.27) 437.95,294.27 ; 747.95,824.27 ccw(c743.02,824.27) 747.95,824.27 ; 837.95,3034.27 ccw(c833.02,3034.27) 837.95,3034.27 ; 867.95,1534.27 ccw(c863.02,1534.27) 867.95,1534.27 ; 907.95,2534.27 ccw(c903.02,2534.27) 907.95,2534.27 ; 927.95,1044.27 ccw(c923.02,1044.27) 927.95,1044.27 ; 1007.94,2694.27 ccw(c1003.02,2694.27) 1007.94,2694.27 ; 1047.94,1464.27 ccw(c1043.02,1464.27) 1047.94,1464.27 ; 1087.94,2524.27 ccw(c1083.02,2524.27) 1087.94,2524.27 ; 1207.94,2604.27 ccw(c1203.02,2604.27) 1207.94,2604.27 ; 1277.94,3034.27 ccw(c1273.02,3034.27) 1277.94,3034.27 ; 1317.94,814.27 ccw(c1313.02,814.27) 1317.94,814.27 ; 1477.94,1174.27 ccw(c1473.02,1174.27) 1477.94,1174.27 ; 1517.94,2364.27 ccw(c1513.02,2364.27) 1517.94,2364.27 ; 1567.94,2094.27 ccw(c1563.02,2094.27) 1567.94,2094.27 ; 1577.94,1594.27 ccw(c1573.02,1594.27) 1577.94,1594.27 ; 1587.94,1434.27 ccw(c1583.02,1434.27) 1587.94,1434.27 ; 1637.94,1214.27 ccw(c1633.02,1214.27) 1637.94,1214.27 ; 1697.94,934.27 ccw(c1693.02,934.27) 1697.94,934.27 ; 1727.94,2004.27 ccw(c1723.02,2004.27) 1727.94,2004.27 ; 1727.94,2184.27 ccw(c1723.02,2184.27) 1727.94,2184.27 ; 1817.94,344.27 ccw(c1813.02,344.27) 1817.94,344.27 ; 1867.94,984.27 ccw(c1863.02,984.27) 1867.94,984.27 ; 2147.94,1924.27 ccw(c2143.02,1924.27) 2147.94,1924.27 ; 2307.94,1004.27 ccw(c2303.02,1004.27) 2307.94,1004.27 ; 2547.94,1244.27 ccw(c2543.02,1244.27) 2547.94,1244.27 ; 2567.94,1394.27 ccw(c2563.02,1394.27) 2567.94,1394.27 ; 2587.94,1754.27 ccw(c2583.02,1754.27) 2587.94,1754.27 ; 2597.94,2084.27 ccw(c2593.02,2084.27) 2597.94,2084.27 ; 2647.94,1144.27 ccw(c2643.02,1144.27) 2647.94,1144.27 ; 2697.94,214.27 ccw(c2693.02,214.27) 2697.94,214.27 ; 2747.94,1144.27 ccw(c2743.02,1144.27) 2747.94,1144.27 ; 2797.94,2164.27 ccw(c2793.02,2164.27) 2797.94,2164.27 ; 2817.94,654.27 ccw(c2813.02,654.27) 2817.94,654.27 ; 2827.94,864.27 ccw(c2823.02,864.27) 2827.94,864.27 ; 2877.94,1934.27 ccw(c2873.02,1934.27) 2877.94,1934.27 ; 3127.94,164.27 ccw(c3123.02,164.27) 3127.94,164.27 ; 3137.94,744.27 ccw(c3133.02,744.27) 3137.94,744.27 ; 3147.94,934.27 ccw(c3143.02,934.27) 3147.94,934.27 ; 3197.94,2334.27 ccw(c3193.02,2334.27) 3197.94,2334.27 ; 3247.94,1944.27 ccw(c3243.02,1944.27) 3247.94,1944.27 ; 3297.94,1154.27 ccw(c3293.02,1154.27) 3297.94,1154.27 ; 3297.94,1234.27 ccw(c3293.02,1234.27) 3297.94,1234.27 ; 3337.94,104.27 ccw(c3333.02,104.27) 3337.94,104.27 ; 3347.94,1234.27 ccw(c3343.02,1234.27) 3347.94,1234.27 ; 3357.94,254.27 ccw(c3353.02,254.27) 3357.94,254.27 ; 3397.94,1234.27 ccw(c3393.02,1234.27) 3397.94,1234.27 ; 3547.94,1764.27 ccw(c3543.02,1764.27) 3547.94,1764.27 ; 3597.94,784.27 ccw(c3593.02,784.27) 3597.94,784.27 ; 3767.94,264.27 ccw(c3763.02,264.27) 3767.94,264.27 ; 3827.94,484.27 ccw(c3823.02,484.27) 3827.94,484.27 ; 3837.94,1774.27 ccw(c3833.02,1774.27) 3837.94,1774.27 ; 3857.94,724.27 ccw(c3853.02,724.27) 3857.94,724.27
  Top Layer w10: 828.02,2694.27 ccw(c823.02,2694.27) 828.02,2694.27 ; 898.02,2614.27 ccw(c893.02,2614.27) 898.02,2614.27 ; 1078.02,1584.27 ccw(c1073.02,1584.27) 1078.02,1584.27 ; 1078.02,3014.27 ccw(c1073.02,3014.27) 1078.02,3014.27 ; 1318.02,2424.27 ccw(c1313.02,2424.27) 1318.02,2424.27 ; 1368.02,2914.27 ccw(c1363.02,2914.27) 1368.02,2914.27 ; 1448.02,2924.27 ccw(c1443.02,2924.27) 1448.02,2924.27 ; 1498.02,2634.27 ccw(c1493.02,2634.27) 1498.02,2634.27 ; 1548.02,2714.27 ccw(c1543.02,2714.27) 1548.02,2714.27 ; 1548.02,2954.27 ccw(c1543.02,2954.27) 1548.02,2954.27 ; 1568.02,2184.27 ccw(c1563.02,2184.27) 1568.02,2184.27 ; 1588.02,2634.27 ccw(c1583.02,2634.27) 1588.02,2634.27 ; 1588.02,2684.27 ccw(c1583.02,2684.27) 1588.02,2684.27 ; 1598.02,1924.27 ccw(c1593.02,1924.27) 1598.02,1924.27 ; 1618.02,1614.27 ccw(c1613.02,1614.27) 1618.02,1614.27 ; 1638.02,2634.27 ccw(c1633.02,2634.27) 1638.02,2634.27 ; 1648.02,1944.27 ccw(c1643.02,1944.27) 1648.02,1944.27 ; 1658.02,2184.27 ccw(c1653.02,2184.27) 1658.02,2184.27 ; 1688.02,1634.27 ccw(c1683.02,1634.27) 1688.02,1634.27 ; 1698.02,2244.27 ccw(c1693.02,2244.27) 1698.02,2244.27 ; 1698.02,2864.27 ccw(c1693.02,2864.27) 1698.02,2864.27 ; 1728.02,1244.27 ccw(c1723.02,1244.27) 1728.02,1244.27 ; 1738.02,2844.27 ccw(c1733.02,2844.27) 1738.02,2844.27 ; 1758.02,1214.27 ccw(c1753.02,1214.27) 1758.02,1214.27 ; 1778.02,2214.27 ccw(c1773.02,2214.27) 1778.02,2214.27 ; 1788.02,1274.27 ccw(c1783.02,1274.27) 1788.02,1274.27 ; 1858.02,2954.27 ccw(c1853.02,2954.27) 1858.02,2954.27 ; 1868.02,2424.27 ccw(c1863.02,2424.27) 1868.02,2424.27 ; 1898.02,2394.27 ccw(c1893.02,2394.27) 1898.02,2394.27 ; 1978.02,1674.27 ccw(c1973.02,1674.27) 1978.02,1674.27 ; 1978.02,1774.27 ccw(c1973.02,1774.27) 1978.02,1774.27 ; 1978.02,1884.27 ccw(c1973.02,1884.27) 1978.02,1884.27 ; 1978.02,3104.27 ccw(c1973.02,3104.27) 1978.02,3104.27 ; 2028.02,2534.27 ccw(c2023.02,2534.27) 2028.02,2534.27 ; 2038.02,2124.27 ccw(c2033.02,2124.27) 2038.02,2124.27 ; 2038.02,2184.27 ccw(c2033.02,2184.27) 2038.02,2184.27 ; 2038.02,2244.27 ccw(c2033.02,2244.27) 2038.02,2244.27 ; 2048.02,864.27 ccw(c2043.02,864.27) 2048.02,864.27 ; 2048.02,1544.27 ccw(c2043.02,1544.27) 2048.02,1544.27 ; 2078.02,2094.27 ccw(c2073.02,2094.27) 2078.02,2094.27 ; 2078.02,2154.27 ccw(c2073.02,2154.27) 2078.02,2154.27 ; 2078.02,2214.27 ccw(c2073.02,2214.27) 2078.02,2214.27 ; 2078.02,2824.27 ccw(c2073.02,2824.27) 2078.02,2824.27 ; 2108.02,684.27 ccw(c2103.02,684.27) 2108.02,684.27 ; 2138.02,604.27 ccw(c2133.02,604.27) 2138.02,604.27 ; 2158.02,504.27 ccw(c2153.02,504.27) 2158.02,504.27 ; 2188.02,474.27 ccw(c2183.02,474.27) 2188.02,474.27 ; 2188.02,2824.27 ccw(c2183.02,2824.27) 2188.02,2824.27 ; 2218.02,444.27 ccw(c2213.02,444.27) 2218.02,444.27 ; 2258.02,404.27 ccw(c2253.02,404.27) 2258.02,404.27 ; 2288.02,2464.27 ccw(c2283.02,2464.27) 2288.02,2464.27 ; 2298.02,374.27 ccw(c2293.02,374.27) 2298.02,374.27 ; 2418.02,354.27 ccw(c2413.02,354.27) 2418.02,354.27 ; 2478.02,334.27 ccw(c2473.02,334.27) 2478.02,334.27 ; 2498.02,554.27 ccw(c2493.02,554.27) 2498.02,554.27 ; 2498.02,624.27 ccw(c2493.02,624.27) 2498.02,624.27 ; 2538.02,314.27 ccw(c2533.02,314.27) 2538.02,314.27 ; 2538.02,574.27 ccw(c2533.02,574.27) 2538.02,574.27 ; 2538.02,734.27 ccw(c2533.02,734.27) 2538.02,734.27 ; 2598.02,574.27 ccw(c2593.02,574.27) 2598.02,574.27 ; 2608.02,444.27 ccw(c2603.02,444.27) 2608.02,444.27 ; 2698.02,2474.27 ccw(c2693.02,2474.27) 2698.02,2474.27 ; 2708.02,624.27 ccw(c2703.02,624.27) 2708.02,624.27 ; 2728.02,2564.27 ccw(c2723.02,2564.27) 2728.02,2564.27 ; 2748.02,2464.27 ccw(c2743.02,2464.27) 2748.02,2464.27 ; 2808.02,504.27 ccw(c2803.02,504.27) 2808.02,504.27 ; 2808.02,2454.27 ccw(c2803.02,2454.27) 2808.02,2454.27 ; 2818.02,574.27 ccw(c2813.02,574.27) 2818.02,574.27 ; 2818.02,2534.27 ccw(c2813.02,2534.27) 2818.02,2534.27 ; 2868.02,724.27 ccw(c2863.02,724.27) 2868.02,724.27 ; 2908.02,2594.27 ccw(c2903.02,2594.27) 2908.02,2594.27 ; 2918.02,654.27 ccw(c2913.02,654.27) 2918.02,654.27 ; 2978.02,504.27 ccw(c2973.02,504.27) 2978.02,504.27 ; 3008.02,2584.27 ccw(c3003.02,2584.27) 3008.02,2584.27 ; 3028.02,624.27 ccw(c3023.02,624.27) 3028.02,624.27 ; 3058.02,724.27 ccw(c3053.02,724.27) 3058.02,724.27 ; 3078.02,404.27 ccw(c3073.02,404.27) 3078.02,404.27 ; 3098.02,504.27 ccw(c3093.02,504.27) 3098.02,504.27 ; 3118.02,384.27 ccw(c3113.02,384.27) 3118.02,384.27 ; 3118.02,444.27 ccw(c3113.02,444.27) 3118.02,444.27 ; 3128.02,344.27 ccw(c3123.02,344.27) 3128.02,344.27 ; 3148.02,304.27 ccw(c3143.02,304.27) 3148.02,304.27 ; 3158.02,594.27 ccw(c3153.02,594.27) 3158.02,594.27 ; 3278.02,374.27 ccw(c3273.02,374.27) 3278.02,374.27
  Top Layer w11.81: 538.93,1984.27 ccw(c533.02,1984.27) 538.93,1984.27 ; 768.93,1984.27 ccw(c763.02,1984.27) 768.93,1984.27 ; 818.93,1584.27 ccw(c813.02,1584.27) 818.93,1584.27 ; 968.93,1734.27 ccw(c963.02,1734.27) 968.93,1734.27
  Top Layer w15.98: 151.02,3077.26 ccw(c143.02,3077.26) 151.02,3077.26 ; 236.02,2534.27 ccw(c228.02,2534.27) 236.02,2534.27 ; 251.02,3077.26 ccw(c243.02,3077.26) 251.02,3077.26 ; 286.02,2634.27 ccw(c278.02,2634.27) 286.02,2634.27 ; 336.02,2534.27 ccw(c328.02,2534.27) 336.02,2534.27 ; 386.02,2634.27 ccw(c378.02,2634.27) 386.02,2634.27 ; 436.02,2534.27 ccw(c428.02,2534.27) 436.02,2534.27 ; 486.02,2634.27 ccw(c478.02,2634.27) 486.02,2634.27 ; 536.02,2534.27 ccw(c528.02,2534.27) 536.02,2534.27 ; 571.02,3077.26 ccw(c563.02,3077.26) 571.02,3077.26 ; 586.02,2634.27 ccw(c578.02,2634.27) 586.02,2634.27 ; 671.02,3077.26 ccw(c663.02,3077.26) 671.02,3077.26 ; 1241.01,1194.27 ccw(c1233.02,1194.27) 1241.01,1194.27 ; 1241.01,1294.27 ccw(c1233.02,1294.27) 1241.01,1294.27
  Top Layer w17.72: 1415.27,254.27 ccw(c1406.41,254.27) 1415.27,254.27 ; 1588.5,254.27 ccw(c1579.64,254.27) 1588.5,254.27
  Top Layer w17.99: 764.52,531.28 ccw(c755.54,531.28) 764.52,531.28 ; 862.51,531.28 ccw(c853.53,531.28) 862.51,531.28 ; 941.53,531.28 ccw(c932.51,531.28) 941.53,531.28 ; 1039.52,531.28 ccw(c1030.54,531.28) 1039.52,531.28
  Top Layer w19.68: 212.87,594.27 ccw(c203.02,594.27) 212.87,594.27 ; 212.87,694.27 ccw(c203.02,694.27) 212.87,694.27 ; 212.87,794.27 ccw(c203.02,794.27) 212.87,794.27 ; 212.87,894.27 ccw(c203.02,894.27) 212.87,894.27 ; 212.87,994.27 ccw(c203.02,994.27) 212.87,994.27 ; 212.87,1094.27 ccw(c203.02,1094.27) 212.87,1094.27 ; 212.87,1194.27 ccw(c203.02,1194.27) 212.87,1194.27 ; 212.87,1294.27 ccw(c203.02,1294.27) 212.87,1294.27 ; 212.87,1394.27 ccw(c203.02,1394.27) 212.87,1394.27 ; 212.87,1494.27 ccw(c203.02,1494.27) 212.87,1494.27 ; 212.87,1594.27 ccw(c203.02,1594.27) 212.87,1594.27 ; 212.87,1694.27 ccw(c203.02,1694.27) 212.87,1694.27 ; 212.87,1794.27 ccw(c203.02,1794.27) 212.87,1794.27 ; 212.87,1894.27 ccw(c203.02,1894.27) 212.87,1894.27 ; 212.87,1994.27 ccw(c203.02,1994.27) 212.87,1994.27 ; 312.87,594.27 ccw(c303.02,594.27) 312.87,594.27 ; 312.87,694.27 ccw(c303.02,694.27) 312.87,694.27 ; 312.87,794.27 ccw(c303.02,794.27) 312.87,794.27 ; 312.87,894.27 ccw(c303.02,894.27) 312.87,894.27 ; 312.87,994.27 ccw(c303.02,994.27) 312.87,994.27 ; 312.87,1094.27 ccw(c303.02,1094.27) 312.87,1094.27 ; 312.87,1194.27 ccw(c303.02,1194.27) 312.87,1194.27 ; 312.87,1294.27 ccw(c303.02,1294.27) 312.87,1294.27 ; 312.87,1394.27 ccw(c303.02,1394.27) 312.87,1394.27 ; 312.87,1494.27 ccw(c303.02,1494.27) 312.87,1494.27 ; 312.87,1594.27 ccw(c303.02,1594.27) 312.87,1594.27 ; 312.87,1694.27 ccw(c303.02,1694.27) 312.87,1694.27 ; 312.87,1794.27 ccw(c303.02,1794.27) 312.87,1794.27 ; 312.87,1894.27 ccw(c303.02,1894.27) 312.87,1894.27 ; 312.87,1994.27 ccw(c303.02,1994.27) 312.87,1994.27
  Top Layer w20: 563.02,714.27 ccw(c553.02,714.27) 563.02,714.27 ; 563.02,814.27 ccw(c553.02,814.27) 563.02,814.27 ; 563.02,914.27 ccw(c553.02,914.27) 563.02,914.27 ; 563.02,1014.27 ccw(c553.02,1014.27) 563.02,1014.27 ; 563.02,1114.27 ccw(c553.02,1114.27) 563.02,1114.27 ; 563.02,1214.27 ccw(c553.02,1214.27) 563.02,1214.27 ; 563.02,1314.27 ccw(c553.02,1314.27) 563.02,1314.27 ; 663.02,714.27 ccw(c653.02,714.27) 663.02,714.27 ; 663.02,814.27 ccw(c653.02,814.27) 663.02,814.27 ; 663.02,914.27 ccw(c653.02,914.27) 663.02,914.27 ; 663.02,1014.27 ccw(c653.02,1014.27) 663.02,1014.27 ; 663.02,1114.27 ccw(c653.02,1114.27) 663.02,1114.27 ; 663.02,1214.27 ccw(c653.02,1214.27) 663.02,1214.27 ; 663.02,1314.27 ccw(c653.02,1314.27) 663.02,1314.27
  Top Layer w30: 2568.02,2784.27 ccw(c2553.02,2784.27) 2568.02,2784.27 ; 2968.02,2784.27 ccw(c2953.02,2784.27) 2968.02,2784.27
  Top Layer w31.5: 3518.77,2854.27 ccw(c3503.02,2854.27) 3518.77,2854.27 ; 3518.77,3054.27 ccw(c3503.02,3054.27) 3518.77,3054.27
  Top Layer w32.52: 104.28,2759.27 ccw(c88.02,2759.27) 104.28,2759.27 ; 734.28,2759.27 ccw(c718.02,2759.27) 734.28,2759.27
  Top Layer w45.51: 657.28,424.27 ccw(c634.52,424.27) 657.28,424.27 ; 1174.29,424.27 ccw(c1151.53,424.27) 1174.29,424.27
  Top Layer w62.99: 209.52,2884.27 ccw(c178.02,2884.27) 209.52,2884.27 ; 659.52,2884.27 ccw(c628.02,2884.27) 659.52,2884.27
  Top Layer w65: 145.5,144.27 ccw(c113.02,144.27) 145.5,144.27 ; 145.5,2324.27 ccw(c113.02,2324.27) 145.5,2324.27 ; 3875.54,144.27 ccw(c3843.02,144.27) 3875.54,144.27 ; 3875.54,2584.27 ccw(c3843.02,2584.27) 3875.54,2584.27

## Keep-outs
Keep-Out Layer:
  lines w10: 3.02,34.27 3.02,3184.27 3953.02,3184.27 3953.02,34.27 3.02,34.27